# EAGLE board Reverb_V2.5 (EAGLE 6.1), part 1 of 2
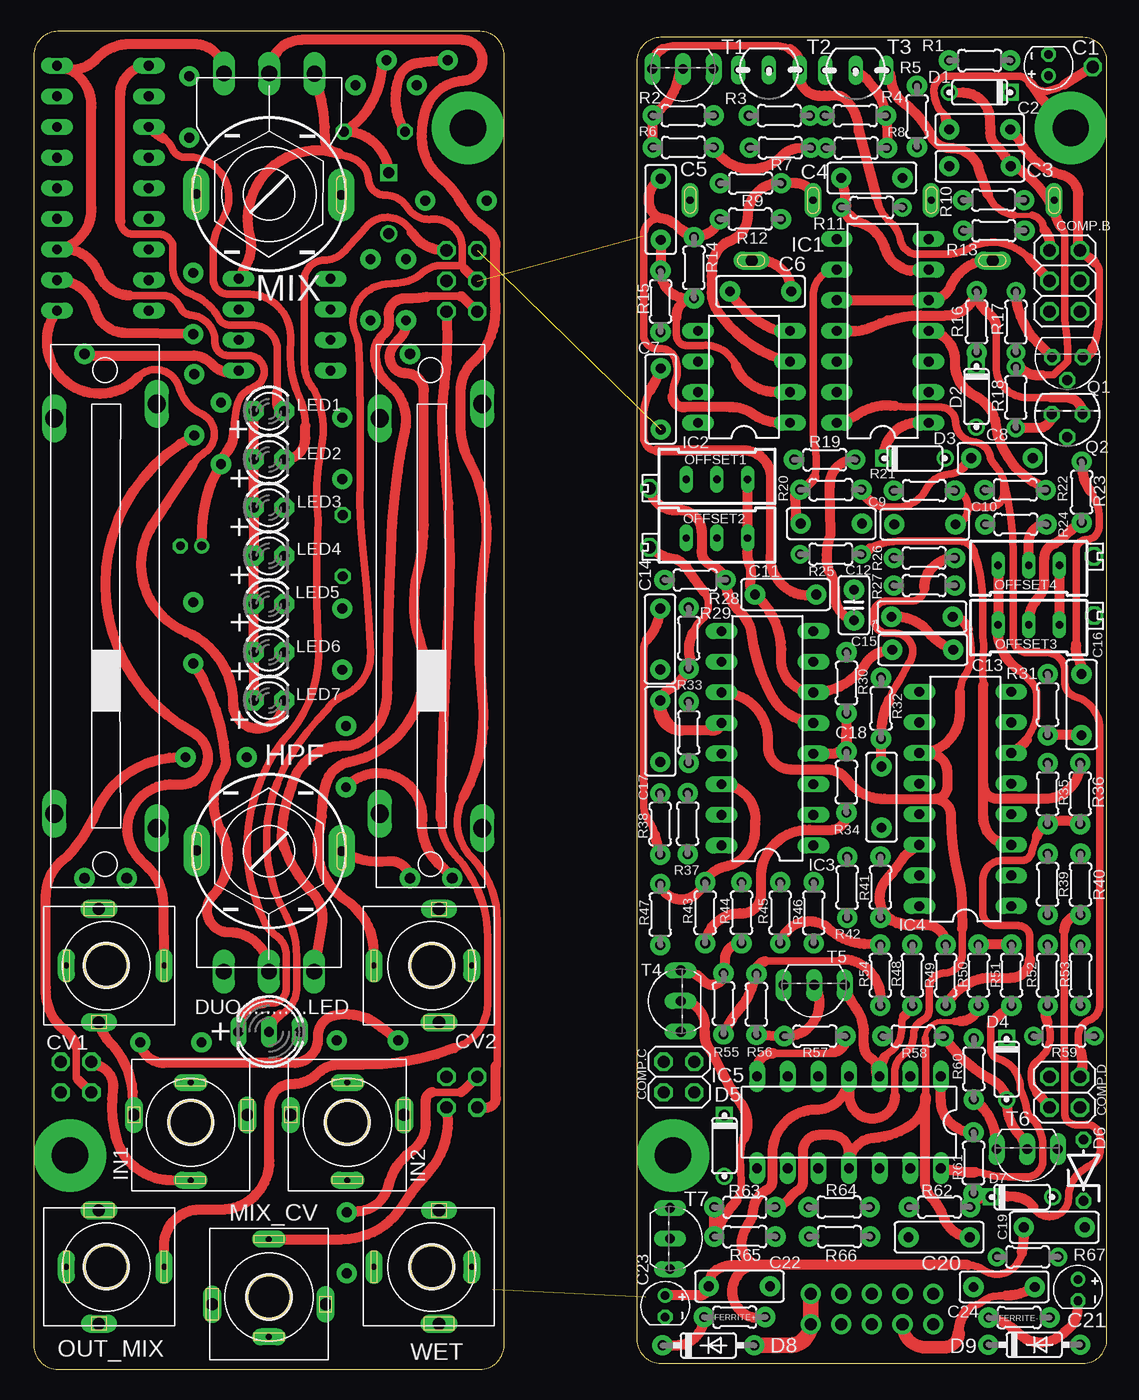
[diagram p0: board, top side]
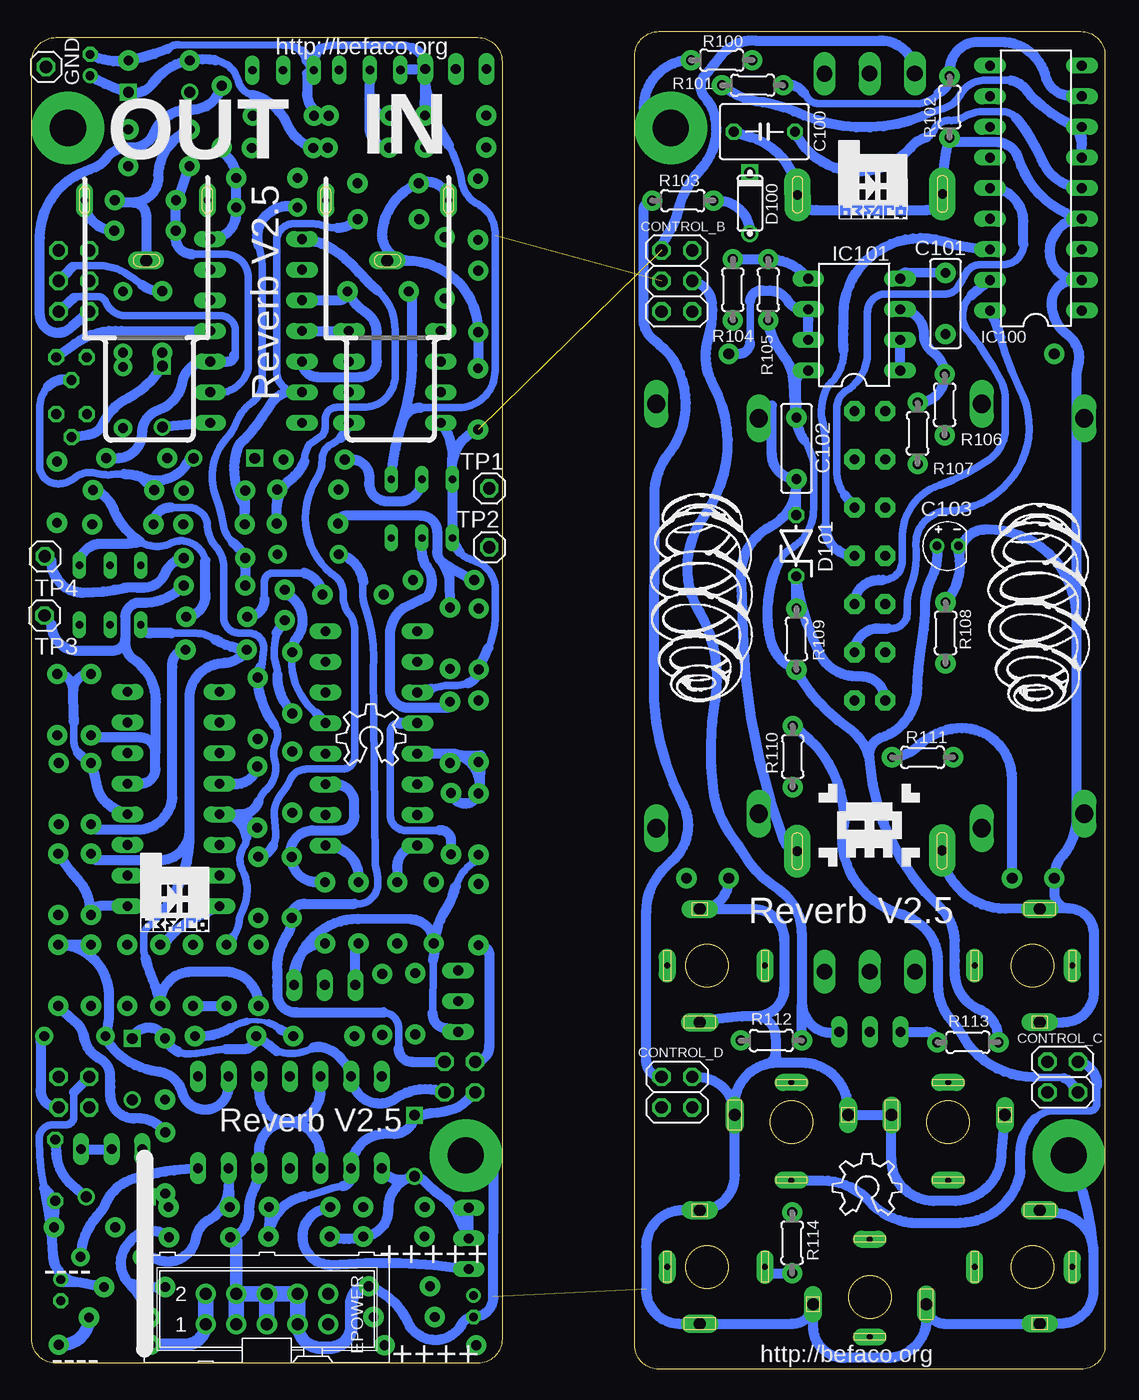
[diagram p1: board, bottom side, seen from below]

Size 89 x 111 mm. Coordinates in mm from the lower left corner, seen from the top.
Outline: 89,2.5 89,108.5 arc90 87,110.5 52,110.5 arc90 50,108.5 50,2.5 arc90 52,0.5 87,0.5 arc90 89,2.5
Outline: 0,109 0,2 arc90 2,0 37,0 arc90 39,2 39,109 arc90 37,111 2,111 arc90 0,109
Copper layers (1*16): Top 0.035mm / dielectric 1.5mm / Bottom 0.035mm
Design rules: minimum track width 6mil, minimum drill 12mil, track to track 6mil, track to pad 6mil, pad to pad 6mil, via to via 6mil, smd to smd 0mil, copper to edge 10mil, drill to drill 10mil, minimum pad ring 10mil, minimum via ring 6mil, stop-mask expansion 2mil, vias tented up to drill 100mil, thermal gap 10mil

## Footprints (pad centres in the part's own frame; a part is rotated, then mirrored left to right if it is on the bottom)
E1,8-4,NEGATIVO = drill 0.711 pad 1.168: + -0.889,0 | drill 0.711 pad 1.168 octagon: - 0.889,0
C050-025X075 = drill 0.813 pad 1.676: 1 -2.54,0; 2 2.54,0
C025-025X050 = drill 0.813 pad 1.676: 1 -1.27,0; 2 1.27,0
C050-045X075 = drill 0.813 octagon: 1 -2.54,0; 2 2.54,0
2X03 = drill 1.016 octagon: 1 -2.54,-1.27; 2 -2.54,1.27; 3 0,-1.27; 4 0,1.27; 5 2.54,-1.27; 6 2.54,1.27
2X02 = drill 1.016 octagon: 1 -1.27,-1.27; 2 -1.27,1.27; 3 1.27,-1.27; 4 1.27,1.27
WQP-PJ301BM = drill 0.5 pad 1.4 long: DESC 0,-3.3; TIP 0,4.8 | drill 1 pad 1.2 long: G1 4.7,-0.6 | drill 1 pad 1.55 long: G2 -4.7,-0.6
DO35-2 = drill 0.9: A 2.54,0 | drill 0.9 square: C -2.54,0
ZDIO-5 = drill 0.813 octagon: A 2.54,0; C -2.54,0
DO35-7 = drill 0.813 pad 1.676: A 3.81,0; C -3.81,0
DUOLED5MM = drill 0.813 long: AG -2.54,0; AR 2.54,0; K 0,0
ML10 = drill 1 pad 1.676: 1 -5.08,-1.27; 2 -5.08,1.27; 3 -2.54,-1.27; 4 -2.54,1.27; 5 0,-1.27; 6 0,1.27; 7 2.54,-1.27; 8 2.54,1.27; 9 5.08,-1.27; 10 5.08,1.27
0204/5 = drill 0.813 pad 1.676: 1 -2.54,0; 2 2.54,0
1X01 = drill 1.016 octagon: 1 0,0
R121N = drill 0.8 pad 2.184 long: C1 -5.995,0.051; C2 6.021,0 | drill 1.3 pad 1.778 long: PIN1 -3.75,-10; PIN2 0,-10; PIN3 3.75,-10
DIL14 = drill 0.813 long: 1 -7.62,-3.81; 2 -5.08,-3.81; 3 -2.54,-3.81; 4 0,-3.81; 5 2.54,-3.81; 6 5.08,-3.81; 7 7.62,-3.81; 8 7.62,3.81; 9 5.08,3.81; 10 2.54,3.81; 11 0,3.81; 12 -2.54,3.81; 13 -5.08,3.81; 14 -7.62,3.81
DIL08 = drill 0.813 long: 1 -3.81,-3.81; 2 -1.27,-3.81; 3 1.27,-3.81; 4 3.81,-3.81; 5 3.81,3.81; 6 1.27,3.81; 7 -1.27,3.81; 8 -3.81,3.81
DIL16 = drill 0.813 long: 1 -8.89,-3.81; 2 -6.35,-3.81; 3 -3.81,-3.81; 4 -1.27,-3.81; 5 1.27,-3.81; 6 3.81,-3.81; 7 6.35,-3.81; 8 8.89,-3.81; 9 8.89,3.81; 10 6.35,3.81; 11 3.81,3.81; 12 1.27,3.81; 13 -1.27,3.81; 14 -3.81,3.81; 15 -6.35,3.81; 16 -8.89,3.81
DIL18 = drill 0.813 long: 1 -10.16,-3.81; 2 -7.62,-3.81; 3 -5.08,-3.81; 4 -2.54,-3.81; 5 0,-3.81; 6 2.54,-3.81; 7 5.08,-3.81; 8 7.62,-3.81; 9 10.16,-3.81; 10 10.16,3.81; 11 7.62,3.81; 12 5.08,3.81; 13 2.54,3.81; 14 0,3.81; 15 -2.54,3.81; 16 -5.08,3.81; 17 -7.62,3.81; 18 -10.16,3.81
RCA_PHONO = drill 0.6 pad 1.422 long: P$1 0,5.12; P$2 0,-5.08 | drill 1 long: P$3 -5,0.02
LED3MM = drill 0.813 pad 1.676 octagon: A -1.27,0; K 1.27,0
RTRIM64X = drill 0.61 long: 1 0,-2.54; 2 0,0; 3 0,2.54
TO92 = drill 0.813 octagon: 1 1.27,0; 2 0,1.905; 3 -1.27,0
0204/5' = drill 0.813 pad 1.524: 1 -2.54,0; 2 2.54,0
SILDER_30 = drill 0.9 pad 1.676: 1 -21.75,1.8; 2 -21.75,-1.7; 3 21.75,1.8 | drill 1.5 long: P$4 -17.6,-4.2; P$5 -16.4,4.3; P$6 16.4,4.3; P$7 17.6,-4.2
TO92-EBC = drill 0.813 long: B 0,-1.27; C 2.54,-1.27; E -2.54,-1.27
TO92- = drill 0.7 pad 1.016 long: 1 2.54,0; 2 0,0; 3 -2.54,0

## Placement (x,y rotation side)
C1  10uF  [E1,8-4,NEGATIVO]  84.16,108.21 90 top
C2  100nF  [C050-025X075]  78.45,102.86 180 top
C3  330pF  [C050-025X075]  78.47,99.82 180 top
C4  100pF  [C050-025X075]  69.5,98.85 0 top
C5  47pF  [C050-025X075]  51.99,96.24 90 top
C6  100nF  [C050-025X075]  60.27,89.43 180 top
C7  100nF  [C050-025X075]  51.99,80.5 90 top
C8  15nF Poliester  [C050-025X075]  80.29,75.6 0 top
C9  1nF Poliester  [C050-025X075]  66.14,70.17 0 top
C10  100pF  [C050-025X075]  73.89,70.12 0 top
C11  100nF  [C050-025X075]  62.35,64.29 180 top
C12  47pF  [C025-025X050]  68.01,63.41 90 top
C13  100nF  [C050-025X075]  73.66,62.43 180 top
C14  100nF  [C050-025X075]  51.94,60.59 90 top
C15  100nF  [C050-025X075]  73.72,59.71 180 top
C16  100pF  [C050-025X075]  86.89,55.16 270 top
C17  47pF  [C050-025X075]  51.96,52.94 90 top
C18  100pF  [C050-025X075]  70.3,47.47 90 top
C19  100nF  [C050-025X075]  84.63,11.78 0 top
C20  100nF  [C050-025X075]  75.08,10.97 0 top
C21  10uF  [E1,8-4,NEGATIVO]  86.6,6.58 270 top
C22  100nF  [C050-025X075]  58.52,6.89 0 top
C23  10uF  [E1,8-4,NEGATIVO]  52.36,5.24 270 top
C24  100nF  [C050-025X075]  80.47,6.84 180 top
C100  680nF  [C050-045X075]  28.24,102.68 180 bottom
C101  100nF  [C050-025X075]  13.22,88.43 90 bottom
C102  100nF  [C050-025X075]  25.59,76.41 270 bottom
C103  10uF  [E1,8-4,NEGATIVO]  13.04,68.31 0 bottom
COMP.B  [2X03]  85.5,90.3 270 top
COMP.C  [2X02]  53.5,24.25 270 top
COMP.D  [2X02]  85.5,23 90 top
CONTROL_B  [2X03]  35.5,90.3 90 bottom
CONTROL_C  [2X02]  3.5,24.25 90 bottom
CONTROL_D  [2X02]  35.5,23 270 bottom
CV1  JACK  [WQP-PJ301BM]  6,33.5 270 top
CV2  JACK  [WQP-PJ301BM]  33,33.5 90 top
D1  1N4148-2  [DO35-2]  78.44,105.95 180 top
D2  1N4148-2  [DO35-2]  78.17,80.71 270 top
D3  1N4148-2  [DO35-2]  73.04,75.59 0 top
D4  1N4148-2  [DO35-2]  80.68,24.9 270 top
D5  1N4148-2  [DO35-2]  57.26,18.55 270 top
D6  1N5231  [ZDIO-5]  87.05,16.52 90 top
D7  1N4148-2  [DO35-2]  81.95,14.31 0 top
D8  1N5817  [DO35-7]  55.94,1.99 0 top
D9  1N5817  [DO35-7]  82.96,2.04 0 top
D100  1N4148-2  [DO35-2]  29.45,96.75 270 bottom
D101  1N5231  [ZDIO-5]  25.61,68.33 90 bottom
DUO...........LED  Duoled_verde_rojo  [DUOLED5MM]  19.5,28 180 top
EPOWER  POWER  [ML10]  69.5,5.01 0 bottom
FERRITE+  ferrite  [0204/5]  58.12,4.34 0 top
FERRITE-  ferrite  [0204/5]  81.71,4.3 180 top
GND  [1X01]  87.82,108.06 0 bottom
HPF  100k  [R121N]  19.5,43 0 top
IC1  TL074P  [DIL14]  70.4,86.16 90 top
IC2  TL072P  [DIL08]  58.89,82.34 90 top
IC3  LM13700N  [DIL16]  60.83,52.35 90 top
IC4  LM13700N  [DIL16]  77.25,47.32 90 top
IC5  TL074P  [DIL14]  67.6,20.5 180 top
IC100  LM3914N  [DIL18]  5.72,98 90 bottom
IC101  TL072P  [DIL08]  20.8,86.67 90 bottom
IN  20-1214 rapid  [RCA_PHONO]  59.5,97 90 bottom
IN1  JACK  [WQP-PJ301BM]  13,20.5 180 top
IN2  JACK  [WQP-PJ301BM]  26,20.5 180 top
LED1  Led Rojo  [LED3MM]  19.5,79.5 0 top
LED2  Led Amarillo  [LED3MM]  19.5,75.5 0 top
LED3  Led Amarillo  [LED3MM]  19.5,71.5 0 top
LED4  Led Verde  [LED3MM]  19.5,67.5 0 top
LED5  Led Verde  [LED3MM]  19.5,63.5 0 top
LED6  Led Verde  [LED3MM]  19.5,59.5 0 top
LED7  Led Verde  [LED3MM]  19.5,55.5 0 top
LOGO1  OSHW_LOGO_6MILX0200-NT  [OSHW_6X200_NOTEXT]  63.7,50.11 0 bottom
LOGO100  OSHW_LOGO_6MILX0200-NT  [OSHW_6X200_NOTEXT]  22.57,12.82 0 bottom
MIX  100k  [R121N]  19.5,97.5 179.9 top
MIX_CV  JACK  [WQP-PJ301BM]  19.5,6 0 top
OFFSET1  100k  [RTRIM64X]  56.65,73.85 90 top
OFFSET2  100k  [RTRIM64X]  56.65,68.97 90 top
OFFSET3  100k  [RTRIM64X]  82.51,61.78 270 top
OFFSET4  100k  [RTRIM64X]  82.51,66.7 270 top
OUT  20-1214 rapid  [RCA_PHONO]  79.5,97 90 bottom
OUT_MIX  JACK  [WQP-PJ301BM]  6,8.5 270 top
Q1  BC517  [TO92]  85.71,83.97 180 top
Q2  BC516  [TO92]  85.7,79.25 180 top
R1  100k  [0204/5]  78.44,108.59 0 top
R2  10k  [0204/5]  53.86,104.02 180 top
R3  10k  [0204/5]  61.83,104.02 180 top
R4  10k  [0204/5]  68.13,104.02 0 top
R5  1k  [0204/5]  73.24,103.95 270 top
R6  220k  [0204/5]  53.86,101.38 180 top
R7  120k  [0204/5]  61.91,101.35 180 top
R8  150k  [0204/5]  68.21,101.33 0 top
R9  1M  [0204/5]  59.44,98.41 180 top
R10  10k  [0204/5]  79.59,97.01 180 top
R11  560k  [0204/5']  69.5,96.4 0 top
R12  10k  [0204/5]  59.42,95.44 180 top
R13  47k  [0204/5]  79.61,94.47 180 top
R14  150k  [0204/5]  54.74,91.4 90 top
R15  10k  [0204/5]  51.98,88.6 270 top
R16  10k  [0204/5]  78.19,86.9 90 top
R17  2r2 Ohm  [0204/5']  81.44,86.9 90 top
R18  2r2 Ohm  [0204/5']  81.44,80.64 90 top
R19  1M  [0204/5]  65.59,75.47 0 top
R20  10k  [0204/5]  66.1,72.98 180 top
R21  100k  [0204/5]  73.85,72.91 180 top
R22  10k  [0204/5]  81.39,72.96 180 top
R23  1M  [0204/5]  86.9,72.78 270 top
R24  1M  [0204/5]  81.44,70.11 0 top
R25  100k  [0204/5']  66.09,67.63 180 top
R26  100k  [0204/5]  73.85,67.32 0 top
R27  100k  [0204/5]  73.85,65.03 0 top
R28  10k  [0204/5]  54.85,65.49 0 top
R29  10k  [0204/5]  54.31,60.66 270 top
R30  47k  [0204/5]  67.4,56.95 90 top
R31  56k  [0204/5]  84.08,55.15 270 top
R32  56k  [0204/5]  70.26,54.85 270 top
R33  1M  [0204/5]  54.31,52.84 270 top
R34  680 Ohm  [0204/5]  67.39,48.72 90 top
R35  470 Ohm  [0204/5]  84.08,47.76 270 top
R36  470 Ohm  [0204/5]  86.77,47.76 270 top
R37  47k  [0204/5]  54.23,45.27 270 top
R38  680 Ohm  [0204/5]  51.94,45.24 90 top
R39  15k  [0204/5]  84.08,40.24 90 top
R40  100k  [0204/5]  86.8,40.24 270 top
R41  7.32k  [0204/5]  70.21,39.99 90 top
R42  100k  [0204/5]  67.45,39.98 90 top
R43  680 Ohm  [0204/5]  55.67,37.89 270 top
R44  15k  [0204/5]  58.69,37.88 90 top
R45  15k  [0204/5]  61.9,37.88 90 top
R46  680 Ohm  [0204/5]  64.68,37.88 270 top
R47  100k  [0204/5]  51.95,37.74 90 top
R48  470 Ohm  [0204/5]  72.86,32.7 270 top
R49  470 Ohm  [0204/5]  75.62,32.7 270 top
R50  15k  [0204/5]  78.34,32.7 270 top
R51  100k  [0204/5]  81.08,32.7 270 top
R52  82k  [0204/5]  84.08,32.7 270 top
R53  100k  [0204/5]  86.8,32.7 270 top
R54  120k  [0204/5]  70.2,32.69 90 top
R55  120k  [0204/5]  57.2,30.33 90 top
R56  100k  [0204/5]  59.93,30.28 90 top
R57  47 Ohm  [0204/5]  64.78,27.65 0 top
R58  1M  [0204/5]  72.92,27.65 180 top
R59  200k  [0204/5']  85.43,27.64 0 top
R60  560 Ohm  [0204/5]  77.96,24.93 270 top
R61  1k  [0204/5]  77.94,17.13 90 top
R62  100k  [0204/5]  75.12,13.47 0 top
R63  100k  [0204/5]  58.96,13.46 0 top
R64  560 Ohm  [0204/5]  66.78,13.46 180 top
R65  47 Ohm  [0204/5]  58.97,11.02 0 top
R66  1M  [0204/5]  66.82,11.02 0 top
R67  100k  [0204/5']  82.42,9.33 180 top
R100  100k  [0204/5]  31.78,108.62 180 bottom
R101  1k  [0204/5]  29.22,106.54 180 bottom
R102  2.7k  [0204/5]  12.89,104.73 270 bottom
R103  10k  [0204/5]  35.01,96.96 0 bottom
R104  1k  [0204/5]  30.86,89.57 270 bottom
R105  1M  [0204/5]  27.92,89.57 90 bottom
R106  1k  [0204/5]  13.29,80.02 270 bottom
R107  1M  [0204/5]  15.53,77.66 90 bottom
R108  10k  [0204/5]  13.22,61.1 270 bottom
R109  180 Ohm  [0204/5]  25.59,60.59 270 bottom
R110  100k  [0204/5]  25.89,50.84 270 bottom
R111  100k  [0204/5]  15.12,50.78 180 bottom
R112  10k  [0204/5]  27.67,27.29 180 bottom
R113  100k  [0204/5]  11.36,27.14 0 bottom
R114  1k  [0204/5]  25.94,10.5 270 bottom
SLIDER_1  SLIDER_SON_HUEYSLIDER_30  [SILDER_30]  6,62.5 90 top
SLIDER_2  SLIDER_SON_HUEYSLIDER_30  [SILDER_30]  33,62.5 90 top
T1  2N3904  [TO92-EBC]  53.83,106.61 180 top
T2  2N3906-  [TO92-]  60.97,107.81 180 top
T3  2N3906-  [TO92-]  68.16,107.78 180 top
T4  2N3906  [TO92-EBC]  52.37,30.55 90 top
T5  2N3906  [TO92-EBC]  64.71,30.62 180 top
T6  2N3906  [TO92-EBC]  82.38,17 180 top
T7  2N3906  [TO92-EBC]  54.03,10.85 270 top
TP1  [1X01]  51.06,73.08 0 bottom
TP2  [1X01]  51.06,68.21 0 bottom
TP3  [1X01]  87.94,62.54 0 bottom
TP4  [1X01]  87.92,67.45 0 bottom
U$2  [LOGOBEFACOCONLETRAS_2]  77.38,38.98 0 bottom
U$100  [LOGOBEFACOCONLETRAS_2]  19.47,98.11 0 bottom
U$101  [CALAVERA_CHICA]  19.15,44.76 0 bottom
WET  JACK  [WQP-PJ301BM]  33,8.5 90 top

## Library data of the parts
C1-C24 C100-C103 FERRITE+ FERRITE- OFFSET1-OFFSET4 R1-R10 R12-R16 R19-R24 R26-R58 R60-R66 R100-R114 = rcl
COMP.B COMP.C COMP.D CONTROL_B CONTROL_C CONTROL_D GND TP1-TP4 = pinhead
CV1 CV2 IN1 IN2 MIX_CV OUT_MIX WET = minijack_3_5_quingpu
D1-D5 D7 D100 = gm-diodes
D6 D8 D9 D101 = diode
DUO...........LED LED1-LED7 = led
EPOWER = con-ml
HPF MIX = pot_12mm_r1212n
IC1 IC2 IC5 IC100 IC101 = linear
IC3 IC4 = ota
IN OUT = rca
LOGO1 LOGO100 = ohw-logo
Q1 = transistor-npn
Q2 = transistor-pnp
R11 R17 R18 R25 R59 R67 = resistor
SLIDER_1 SLIDER_2 = slider_son_huey
T1 T4-T7 = transistor-neu-to92
T2 T3 = gm-trans
U$2 U$100 = logo befaco
U$101 = Logo_Familiar

## Nets
+12V: C2.1 C7.1 C13.1 C14.1 C19.1 C22.1 C23.+ C102.1 C103.+ COMP.B.2 CONTROL_B.6 FERRITE+.2 IC1.4 IC2.8 IC3.11 IC4.11 IC5.4 IC100.3 IC100.9 IC101.8 MIX.PIN3 OFFSET1.3 OFFSET2.3 OFFSET3.3 OFFSET4.3 Q1.3 R22.1 R105.1 R107.1 R109.2 R112.2 R113.2
-12V: C1.- C6.2 C11.2 C15.2 C20.2 C21.- C24.2 C101.2 COMP.B.4 CONTROL_B.4 DUO...........LED.K FERRITE-.2 IC1.11 IC2.4 IC3.6 IC4.6 IC5.11 IC101.4 MIX.PIN1 OFFSET1.1 OFFSET2.1 OFFSET3.1 OFFSET4.1 Q2.3 R1.2 R2.1 R3.1 R4.1 R16.2 R39.2 R50.2 R54.1 R55.1 R56.2 R63.2 T1.E T2.1 T3.1
A_CV1: CONTROL_C.2 R111.1
A_CV2: CONTROL_C.1 R110.1
A_HPF: CONTROL_B.2 HPF.PIN3
A_IN: CONTROL_C.4 IN1.TIP
A_IN1: CONTROL_C.3 IN2.TIP
A_LED_ROJO: CONTROL_B.5 DUO...........LED.AR R113.1
A_LED_VERDE: CONTROL_B.3 DUO...........LED.AG R112.1
A_MIX: CONTROL_D.3 MIX.PIN2
A_MIX_CV: CONTROL_D.4 MIX_CV.TIP
A_MIX_OUT: CONTROL_B.1 OUT_MIX.TIP
A_MIX_OUT1: C17.2 IC3.12 R29.2 R37.2 TP2.1
A_VUMETRO+WET: CONTROL_D.1 R103.1 R114.1
DELAYED2: C5.2 IC2.1 R12.2 R14.2 R41.2
GND: C2.2 C6.1 C7.2 C11.1 C13.2 C14.2 C15.1 C19.2 C20.1 C21.+ C22.2 C23.- C24.1 C100.2 C101.1 C102.2 C103.- COMP.D.4 CONTROL_D.2 CV1.G1 CV1.G2 CV2.G1 CV2.G2 D6.C D101.A EPOWER.3 EPOWER.4 EPOWER.5 EPOWER.6 EPOWER.7 EPOWER.8 GND.1 HPF.C1 HPF.C2 IC1.5 IC1.10 IC1.12 IC5.3 IC5.5 IC5.10 IC5.12 IC100.2 IC100.4 IN1.G1 IN1.G2 IN2.G1 IN2.G2 IN.P$2 IN.P$3 MIX.C1 MIX.C2 MIX_CV.G1 MIX_CV.G2 OUT.P$3 OUT_MIX.G1 OUT_MIX.G2 R9.2 R10.1 R15.2 R34.1 R35.2 R36.2 R38.1 R43.2 R46.2 R48.2 R49.2 R100.2 R102.2 R108.1 SLIDER_1.1 SLIDER_2.1 T4.E T5.E WET.G1 WET.G2
N$1: IC100.6 IC100.7 R101.2
N$2: HPF.PIN2 R108.2
N$3: IC100.8 R101.1 R102.1
N$4: D100.A R103.2
N$5: C100.1 D100.C IC100.5 R100.1
N$6: C9.1 IC1.9 R20.2 R28.1 R29.1
N$7: C5.1 IC2.2 R14.1 R15.1
N$8: IC2.3 IN.P$1 R9.1
N$9: D4.A IC5.7 R57.2 R58.1 T6.B T6.E
N$10: C10.1 IC1.13 R12.1 R21.2
N$11: CV2.TIP R104.2
N$12: C4.2 IC1.7 R5.2 R11.2
N$13: IC3.3 R42.2 R46.1
N$14: IC4.1 R39.1 R40.1
N$15: C12.1 IC3.4 R19.2 R30.1 R34.2
N$16: IC3.14 R43.1 R47.2
N$17: C3.1 D1.A OUT.P$1 R13.1 R17.1 R18.2
N$18: R56.1 R57.1 T5.B
N$19: D5.A IC5.8 R65.2 R66.1 T7.B T7.E
N$20: R45.1 R54.2 T5.C
N$21: IC100.16 LED4.K
N$22: IC5.14 R51.2 R67.1
N$23: IC100.1 LED7.K
N$24: IC4.16 R50.1 R51.1
N$25: C17.1 IC3.13 R33.2 R37.1 R38.2
N$26: CV1.TIP R106.2
N$27: R44.1 R55.2 T4.C
N$28: IC3.1 R45.2
N$29: IC3.16 R44.2
N$30: IC100.18 LED6.K
N$31: IC100.17 LED5.K
N$32: IC101.1 IC101.2 SLIDER_1.3
N$33: IC100.14 LED3.K
N$34: IC100.12 LED2.K
N$35: IC100.10 LED1.K
N$36: R2.2 R6.2 T1.B
N$37: R4.2 R8.2 T3.2
N$38: R114.2 WET.TIP
N$39: D8.A EPOWER.9 EPOWER.10
N$40: D101.C LED1.A LED2.A LED3.A LED4.A LED5.A LED6.A LED7.A R109.1
N$41: D7.C R40.2 R61.1 R62.2
N$42: D9.C EPOWER.1 EPOWER.2
N$43: IC5.2 R52.1 R53.1 R59.1
N$44: C4.1 IC1.6 R11.1 R26.1 R27.1
N$45: R111.2 SLIDER_1.2
N$46: R3.2 R7.2 T2.2
N$47: R110.2 SLIDER_2.2
N$48: IC101.3 R106.1 R107.2
N$49: C18.2 IC4.12 R26.2 R32.2 TP4.1
N$50: C18.1 IC4.13 R24.1 R32.1 R48.1
N$51: IC101.6 IC101.7 SLIDER_2.3
N$52: C12.2 IC3.5 R28.2 R30.2 TP1.1
N$53: IC101.5 R104.1 R105.2
N$54: IC4.14 R41.1 R49.1
N$55: R64.2 T7.C
N$56: R60.2 T6.C
N$57: D6.A D7.A
N$58: C16.2 IC4.5 R27.2 R31.2 TP3.1
N$59: C16.1 IC4.4 R23.1 R31.1 R35.1
N$60: IC4.3 R25.1 R36.1
N$61: IC5.13 R62.1 R67.2
N$62: OFFSET1.2 R19.1
N$63: OFFSET2.2 R33.1
N$64: R63.1 R65.1 T4.B
N$65: OFFSET4.2 R24.2
N$66: C3.2 IC1.2 R10.2 R13.2
N$67: OFFSET3.2 R23.2
N$68: D3.A Q1.2 R22.2
N$69: D2.A D3.C IC1.1
N$70: D2.C Q2.2 R16.1
N$71: D8.C FERRITE+.1
N$72: Q1.1 R17.2
N$73: IC5.1 R53.2 R61.2
N$74: Q2.1 R18.1
N$75: D9.A FERRITE-.1
N$82: C8.1 C9.2 IC1.8 R20.1
TO_A_IN: COMP.C.2 R25.2 R42.1
TO_A_IN1: COMP.C.1 R47.1
TO_CV1: COMP.C.4 D4.C IC5.6 R58.2 R60.1
TO_CV2: COMP.C.3 D5.C IC5.9 R64.1 R66.2
TO_HPF: C8.2 COMP.B.6 IC1.3
TO_LED_ROJO: COMP.B.1 T3.3
TO_LED_VERDE: COMP.B.3 T1.C T2.3
TO_MIX: COMP.D.1 R59.2
TO_MIX_CV: COMP.D.2 R52.2
TO_MIX_OUT: COMP.B.5 R5.1
TO_SALIDA_ENVOLVENTE: C1.+ D1.C R1.1 R6.1 R7.1 R8.1
TO_VUMETRO+WET: C10.2 COMP.D.3 IC1.14 R21.1